# Altium PCB Advanced Clock.PcbDoc (part 3 of 7)
Units mil, origin at the board's own origin, x right, y up, seen from the top; angles counter-clockwise.
Board outline 3854 x 3880 mil, 2 copper layers (Top Layer, Bottom Layer); 117 components, 90 nets, 504 pads, 209 vias.
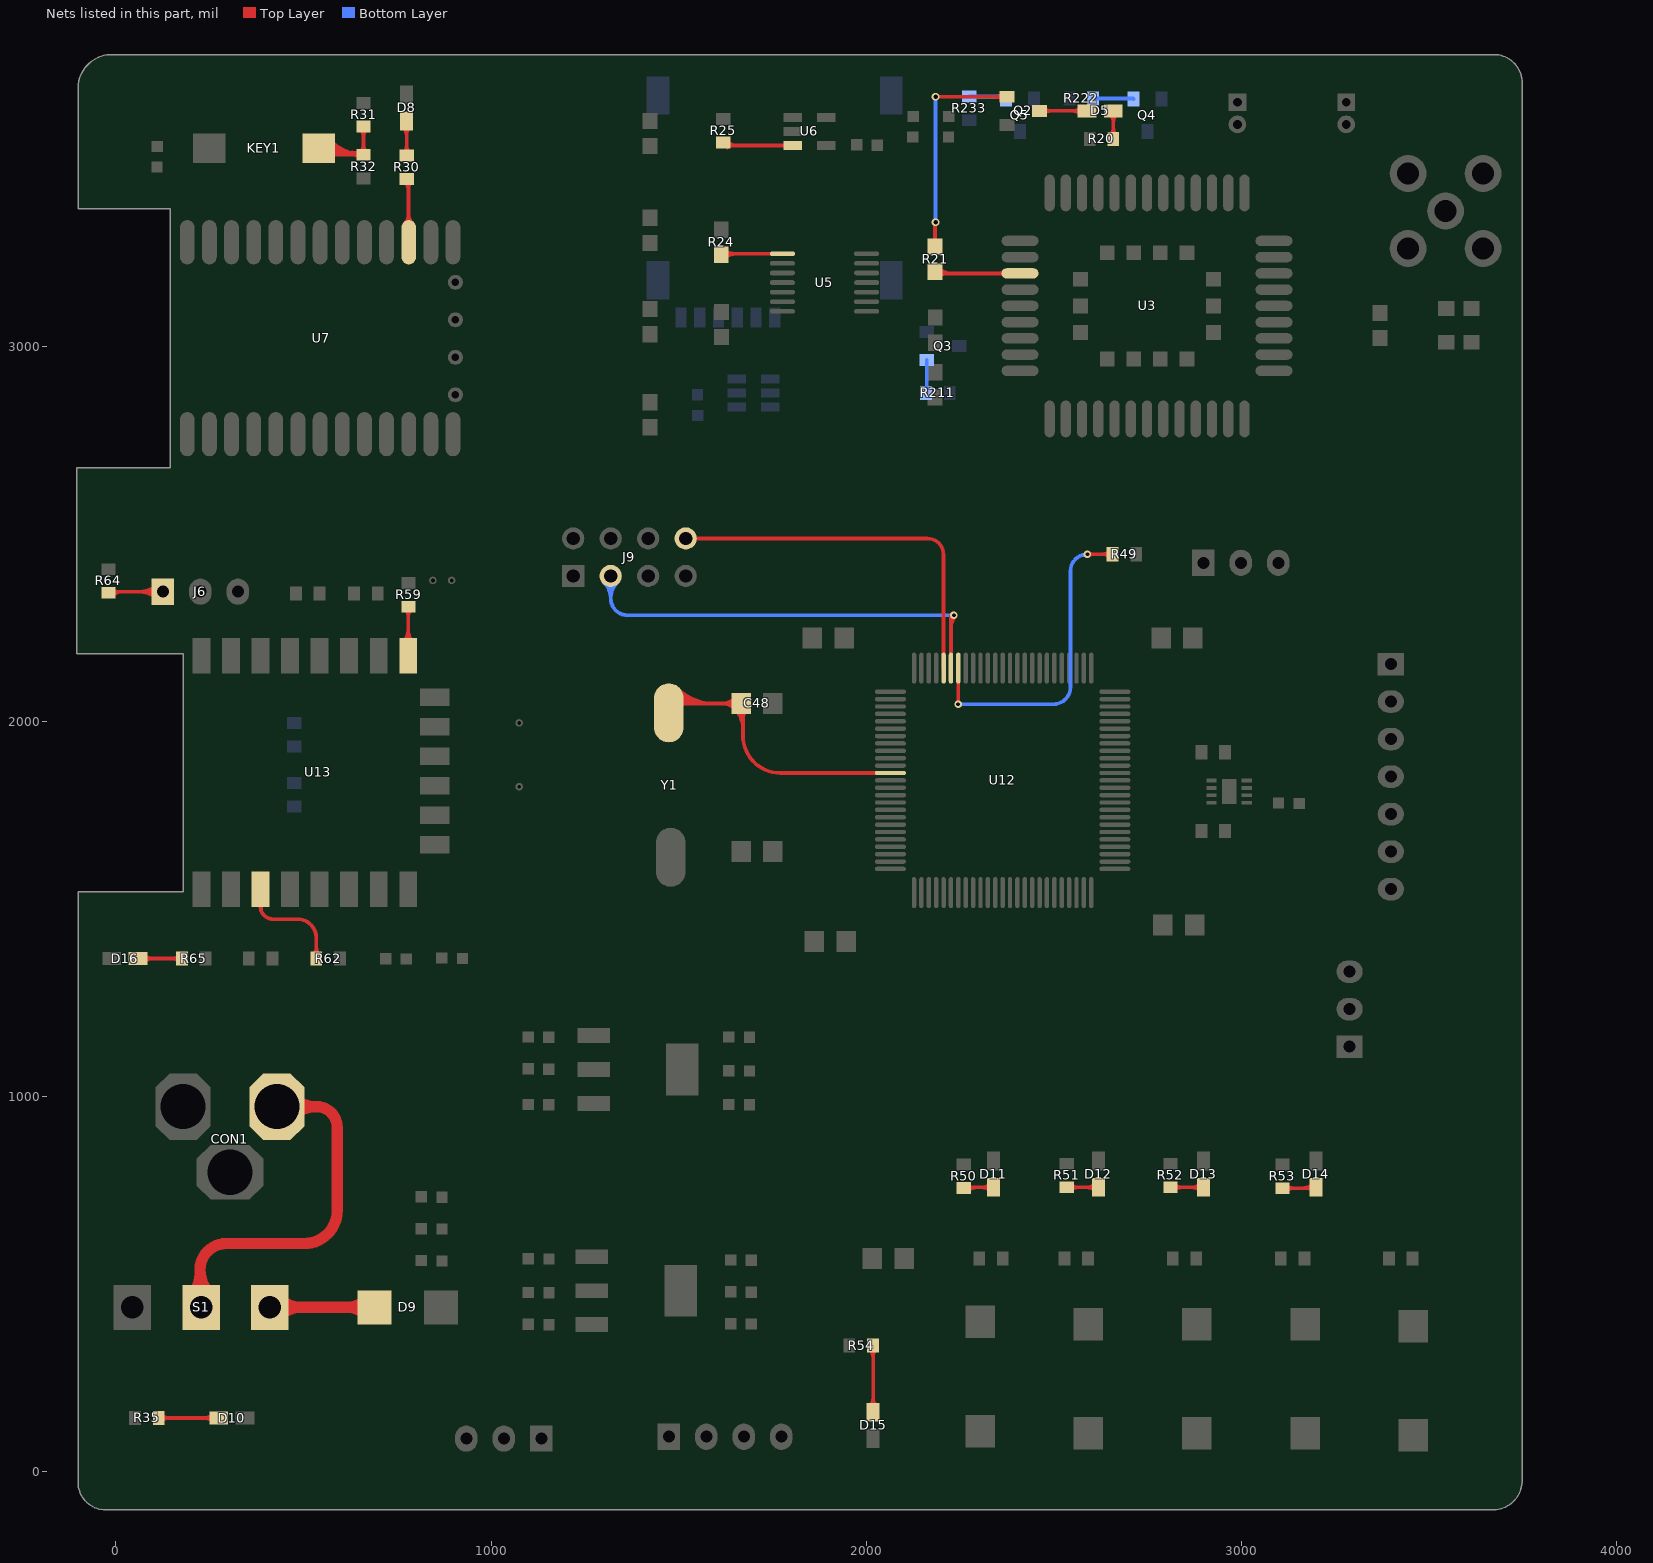
[diagram p3: the nets of this part, all layers, seen from the top]

## Via types
v1: diameter 20, hole 12, Top Layer to Bottom Layer, 133 vias
v2: diameter 20, hole 10, Top Layer to Bottom Layer, 30 vias
v3: diameter 15, hole 7, Top Layer to Bottom Layer, 26 vias
v4: diameter 30, hole 20, Top Layer to Bottom Layer, 11 vias
v5: diameter 138, hole 137.8, Top Layer to Bottom Layer, 4 vias
v6: diameter 50, hole 30, Top Layer to Bottom Layer, 4 vias
v7: diameter 40, hole 20, Top Layer to Bottom Layer, 1 vias

## Nets (pads, with @x,y where several pads share a name; then routed paths per layer and width w, separated by ;. In a path a pad name is that pad's centre, name@x,y a point inside that pad or via, vN(x,y) a via of type N, cw(c..) or ccw(c..) an arc to the next point about the centre after c; other vN are vias at no path point) (continued)
NetC48_2: C48.2 U12.12 Y1.1 | length 3559
  Top Layer w10: Y1.1@1474,2022 cw(c1479,2022) 1479,2027 1499,2047 1671.5,2047 1671.5,1961.68 ccw(c1771.5,1961.68) 1771.5,1861.68 U12.12@2064.79,1861.68 ; Y1.1@1477.09,2064.46 ccw(c1519.24,2106.61) 1519.24,2047 ; Y1.1@1477.09,2064.46 ccw(c1519.24,2106.61) 1519.24,2047 ; Y1.1@1477.09,2064.46 ccw(c1519.24,2106.61) 1519.24,2047 ; Y1.1@1477.09,2064.46 ccw(c1519.24,2106.61) 1519.24,2047 ; Y1.1@1477.09,2064.46 ccw(c1519.24,2106.61) 1519.24,2047 ; Y1.1@1484.16,2071.53 ccw(c1543.38,2130.75) 1543.38,2047 ; Y1.1@1484.16,2071.53 ccw(c1543.38,2130.75) 1543.38,2047 ; Y1.1@1484.16,2071.53 ccw(c1543.38,2130.75) 1543.38,2047 ; Y1.1@1484.16,2071.53 ccw(c1543.38,2130.75) 1543.38,2047 ; Y1.1@1484.16,2071.53 ccw(c1543.38,2130.75) 1543.38,2047 ; Y1.1@1491.23,2078.6 ccw(c1567.53,2154.9) 1567.53,2047 ; Y1.1@1491.23,2078.6 ccw(c1567.53,2154.9) 1567.53,2047 ; Y1.1@1491.23,2078.6 ccw(c1567.53,2154.9) 1567.53,2047 ; Y1.1@1491.23,2078.6 ccw(c1567.53,2154.9) 1567.53,2047 ; Y1.1@1491.23,2078.6 ccw(c1567.53,2154.9) 1567.53,2047 ; Y1.1@1498.3,2037.07 cw(c1522.28,2013.09) 1522.28,2047 ; Y1.1@1498.3,2037.07 cw(c1522.28,2013.09) 1522.28,2047 ; Y1.1@1498.3,2037.07 cw(c1522.28,2013.09) 1522.28,2047 ; Y1.1@1498.3,2037.07 cw(c1522.28,2013.09) 1522.28,2047 ; Y1.1@1498.3,2037.07 cw(c1522.28,2013.09) 1522.28,2047 ; Y1.1@1498.3,2085.67 ccw(c1591.67,2179.04) 1591.67,2047 ; Y1.1@1498.3,2085.67 ccw(c1591.67,2179.04) 1591.67,2047 ; Y1.1@1498.3,2085.67 ccw(c1591.67,2179.04) 1591.67,2047 ; Y1.1@1498.3,2085.67 ccw(c1591.67,2179.04) 1591.67,2047 ; Y1.1@1498.3,2085.67 ccw(c1591.67,2179.04) 1591.67,2047 ; 1615.8,2047 cw(c1615.8,1996.3) C48.2@1651.65,2032.15 ; 1615.8,2047 ccw(c1615.8,2097.7) C48.2@1651.65,2061.85 ; 1615.8,2047 cw(c1615.8,1996.3) C48.2@1651.65,2032.15 ; 1615.8,2047 ccw(c1615.8,2097.7) C48.2@1651.65,2061.85 ; 1615.8,2047 cw(c1615.8,1996.3) C48.2@1651.65,2032.15 ; 1615.8,2047 ccw(c1615.8,2097.7) C48.2@1651.65,2061.85 ; 1615.8,2047 cw(c1615.8,1996.3) C48.2@1651.65,2032.15 ; 1615.8,2047 ccw(c1615.8,2097.7) C48.2@1651.65,2061.85 ; 1615.8,2047 cw(c1615.8,1996.3) C48.2@1651.65,2032.15 ; 1615.8,2047 ccw(c1615.8,2097.7) C48.2@1651.65,2061.85 ; 1639.94,2047 cw(c1639.94,2020.44) C48.2@1658.72,2039.22 ; 1639.94,2047 ccw(c1639.94,2073.56) C48.2@1658.72,2054.78 ; 1639.94,2047 cw(c1639.94,2020.44) C48.2@1658.72,2039.22 ; 1639.94,2047 ccw(c1639.94,2073.56) C48.2@1658.72,2054.78 ; 1639.94,2047 cw(c1639.94,2020.44) C48.2@1658.72,2039.22 ; 1639.94,2047 ccw(c1639.94,2073.56) C48.2@1658.72,2054.78 ; 1639.94,2047 cw(c1639.94,2020.44) C48.2@1658.72,2039.22 ; 1639.94,2047 ccw(c1639.94,2073.56) C48.2@1658.72,2054.78 ; 1639.94,2047 cw(c1639.94,2020.44) C48.2@1658.72,2039.22 ; 1639.94,2047 ccw(c1639.94,2073.56) C48.2@1658.72,2054.78 ; C48.2@1651.65,2030.15 cw(c1603.73,1982.23) 1671.5,1982.23 ; C48.2@1651.65,2030.15 cw(c1603.73,1982.23) 1671.5,1982.23 ; C48.2@1651.65,2030.15 cw(c1603.73,1982.23) 1671.5,1982.23 ; C48.2@1651.65,2030.15 cw(c1603.73,1982.23) 1671.5,1982.23 ; C48.2@1651.65,2030.15 cw(c1603.73,1982.23) 1671.5,1982.23 ; C48.2@1658.72,2037.22 cw(c1627.87,2006.37) 1671.5,2006.37 ; C48.2@1658.72,2037.22 cw(c1627.87,2006.37) 1671.5,2006.37 ; C48.2@1658.72,2037.22 cw(c1627.87,2006.37) 1671.5,2006.37 ; C48.2@1658.72,2037.22 cw(c1627.87,2006.37) 1671.5,2006.37 ; C48.2@1658.72,2037.22 cw(c1627.87,2006.37) 1671.5,2006.37 ; 1671.5,2006.37 cw(c1705.13,2006.37) C48.2@1681.35,2030.15 ; 1671.5,2006.37 cw(c1705.13,2006.37) C48.2@1681.35,2030.15 ; 1671.5,2006.37 cw(c1705.13,2006.37) C48.2@1681.35,2030.15 ; 1671.5,2006.37 cw(c1705.13,2006.37) C48.2@1681.35,2030.15 ; 1671.5,2006.37 cw(c1705.13,2006.37) C48.2@1681.35,2030.15
NetCON1_1: CON1.1 S1.2 | length 2416.7
  Top Layer w30: S1.2@224,437 224,537 ; CON1.1@429,972 535.11,972 ; S1.2@202.25,471.75 ccw(c149.75,524.25) 224,524.25 ; S1.2@202.25,471.75 ccw(c149.75,524.25) 224,524.25 ; S1.2@202.25,471.75 ccw(c149.75,524.25) 224,524.25 ; S1.2@202.25,471.75 ccw(c149.75,524.25) 224,524.25 ; S1.2@202.25,471.75 ccw(c149.75,524.25) 224,524.25 ; 224,537 ccw(c314.57,537) S1.2@251.41,472.08 ; 224,537 ccw(c314.57,537) S1.2@251.41,472.08 ; 224,537 ccw(c314.57,537) S1.2@251.41,472.08 ; 224,537 ccw(c314.57,537) S1.2@251.41,472.08 ; 224,537 ccw(c314.57,537) S1.2@251.41,472.08 ; 224,537 cw(c294,537) 294,607 502,607 ccw(c502,695) 590,695 590,917.11 ccw(c535.11,917.11) 535.11,972 ; CON1.1@465.04,940.31 cw(c535.11,878.7) 535.11,972 ; CON1.1@465.04,940.31 cw(c535.11,878.7) 535.11,972 ; CON1.1@465.04,940.31 cw(c535.11,878.7) 535.11,972 ; CON1.1@465.04,940.31 cw(c535.11,878.7) 535.11,972 ; CON1.1@465.04,940.31 cw(c535.11,878.7) 535.11,972 ; CON1.1@465.04,1003.69 ccw(c535.11,1065.3) 535.11,972 ; CON1.1@465.04,1003.69 ccw(c535.11,1065.3) 535.11,972 ; CON1.1@465.04,1003.69 ccw(c535.11,1065.3) 535.11,972 ; CON1.1@465.04,1003.69 ccw(c535.11,1065.3) 535.11,972 ; CON1.1@465.04,1003.69 ccw(c535.11,1065.3) 535.11,972
NetD5_A: D5.A R20.1 | length 790
  Top Layer w10: R20.1@2659,3542 D5.A@2659,3626.74 ; D5.A@2650.16,3617.91 cw(c2628.82,3596.57) 2659,3596.57 ; D5.A@2650.16,3617.91 cw(c2628.82,3596.57) 2659,3596.57 ; D5.A@2650.16,3617.91 cw(c2628.82,3596.57) 2659,3596.57 ; D5.A@2650.16,3617.91 cw(c2628.82,3596.57) 2659,3596.57 ; D5.A@2650.16,3617.91 cw(c2628.82,3596.57) 2659,3596.57 ; D5.A@2650.16,3617.91 cw(c2628.82,3596.57) 2659,3596.57 ; D5.A@2650.16,3617.91 cw(c2628.82,3596.57) 2659,3596.57 ; D5.A@2650.16,3617.91 cw(c2628.82,3596.57) 2659,3596.57 ; R20.1@2651.4,3562.85 ccw(c2633.06,3581.18) 2659,3581.18 ; R20.1@2651.4,3562.85 ccw(c2633.06,3581.18) 2659,3581.18 ; R20.1@2651.4,3562.85 ccw(c2633.06,3581.18) 2659,3581.18 ; R20.1@2651.4,3562.85 ccw(c2633.06,3581.18) 2659,3581.18 ; R20.1@2651.4,3562.85 ccw(c2633.06,3581.18) 2659,3581.18 ; R20.1@2651.4,3562.85 ccw(c2633.06,3581.18) 2659,3581.18 ; R20.1@2651.4,3562.85 ccw(c2633.06,3581.18) 2659,3581.18 ; R20.1@2651.4,3562.85 ccw(c2633.06,3581.18) 2659,3581.18 ; 2659,3581.21 ccw(c2684.96,3581.21) R20.1@2666.6,3562.85 ; 2659,3581.21 ccw(c2684.96,3581.21) R20.1@2666.6,3562.85 ; 2659,3581.21 ccw(c2684.96,3581.21) R20.1@2666.6,3562.85 ; 2659,3581.21 ccw(c2684.96,3581.21) R20.1@2666.6,3562.85 ; 2659,3581.21 ccw(c2684.96,3581.21) R20.1@2666.6,3562.85 ; 2659,3581.21 ccw(c2684.96,3581.21) R20.1@2666.6,3562.85 ; 2659,3581.21 ccw(c2684.96,3581.21) R20.1@2666.6,3562.85 ; 2659,3581.21 ccw(c2684.96,3581.21) R20.1@2666.6,3562.85 ; 2659,3596.57 cw(c2689.17,3596.57) D5.A@2667.83,3617.91 ; 2659,3596.57 cw(c2689.17,3596.57) D5.A@2667.83,3617.91 ; 2659,3596.57 cw(c2689.17,3596.57) D5.A@2667.83,3617.91 ; 2659,3596.57 cw(c2689.17,3596.57) D5.A@2667.83,3617.91 ; 2659,3596.57 cw(c2689.17,3596.57) D5.A@2667.83,3617.91 ; 2659,3596.57 cw(c2689.17,3596.57) D5.A@2667.83,3617.91 ; 2659,3596.57 cw(c2689.17,3596.57) D5.A@2667.83,3617.91 ; 2659,3596.57 cw(c2689.17,3596.57) D5.A@2667.83,3617.91
NetD5_K: D5.K Q2.3 | length 690
  Top Layer w10: Q2.3@2462.31,3627 2589,3627 D5.K@2589,3626.74 ; Q2.3@2473.84,3619.4 cw(c2492.19,3601.05) 2492.19,3627 ; Q2.3@2473.84,3619.4 cw(c2492.19,3601.05) 2492.19,3627 ; Q2.3@2473.84,3619.4 cw(c2492.19,3601.05) 2492.19,3627 ; Q2.3@2473.84,3619.4 cw(c2492.19,3601.05) 2492.19,3627 ; Q2.3@2473.84,3619.4 cw(c2492.19,3601.05) 2492.19,3627 ; Q2.3@2473.84,3619.4 cw(c2492.19,3601.05) 2492.19,3627 ; Q2.3@2473.84,3619.4 cw(c2492.19,3601.05) 2492.19,3627 ; Q2.3@2473.84,3619.4 cw(c2492.19,3601.05) 2492.19,3627 ; Q2.3@2473.84,3634.6 ccw(c2492.19,3652.95) 2492.19,3627 ; Q2.3@2473.84,3634.6 ccw(c2492.19,3652.95) 2492.19,3627 ; Q2.3@2473.84,3634.6 ccw(c2492.19,3652.95) 2492.19,3627 ; Q2.3@2473.84,3634.6 ccw(c2492.19,3652.95) 2492.19,3627 ; Q2.3@2473.84,3634.6 ccw(c2492.19,3652.95) 2492.19,3627 ; Q2.3@2473.84,3634.6 ccw(c2492.19,3652.95) 2492.19,3627 ; Q2.3@2473.84,3634.6 ccw(c2492.19,3652.95) 2492.19,3627 ; Q2.3@2473.84,3634.6 ccw(c2492.19,3652.95) 2492.19,3627 ; 2550.7,3627 cw(c2550.7,3595.95) D5.K@2572.66,3617.91 ; 2550.7,3627 cw(c2550.7,3595.95) D5.K@2572.66,3617.91 ; 2550.7,3627 cw(c2550.7,3595.95) D5.K@2572.66,3617.91 ; 2550.7,3627 cw(c2550.7,3595.95) D5.K@2572.66,3617.91 ; 2550.7,3627 cw(c2550.7,3595.95) D5.K@2572.66,3617.91 ; 2551.93,3627 ccw(c2551.93,3656.3) D5.K@2572.66,3635.58 ; 2551.93,3627 ccw(c2551.93,3656.3) D5.K@2572.66,3635.58 ; 2551.93,3627 ccw(c2551.93,3656.3) D5.K@2572.66,3635.58 ; 2551.93,3627 ccw(c2551.93,3656.3) D5.K@2572.66,3635.58 ; 2551.93,3627 ccw(c2551.93,3656.3) D5.K@2572.66,3635.58
NetD8_A: D8.A R30.2 | length 655.1
  Top Layer w10: R30.2@775,3507.99 D8.A@775,3600 ; D8.A@765.91,3583.67 cw(c743.95,3561.71) 775,3561.71 ; D8.A@765.91,3583.67 cw(c743.95,3561.71) 775,3561.71 ; D8.A@765.91,3583.67 cw(c743.95,3561.71) 775,3561.71 ; D8.A@765.91,3583.67 cw(c743.95,3561.71) 775,3561.71 ; D8.A@765.91,3583.67 cw(c743.95,3561.71) 775,3561.71 ; R30.2@767.4,3515.59 ccw(c749.05,3533.94) 775,3533.94 ; R30.2@767.4,3515.59 ccw(c749.05,3533.94) 775,3533.94 ; R30.2@767.4,3515.59 ccw(c749.05,3533.94) 775,3533.94 ; R30.2@767.4,3515.59 ccw(c749.05,3533.94) 775,3533.94 ; R30.2@767.4,3515.59 ccw(c749.05,3533.94) 775,3533.94 ; R30.2@767.4,3515.59 ccw(c749.05,3533.94) 775,3533.94 ; R30.2@767.4,3515.59 ccw(c749.05,3533.94) 775,3533.94 ; R30.2@767.4,3515.59 ccw(c749.05,3533.94) 775,3533.94 ; 775,3533.94 ccw(c800.95,3533.94) R30.2@782.6,3515.59 ; 775,3533.94 ccw(c800.95,3533.94) R30.2@782.6,3515.59 ; 775,3533.94 ccw(c800.95,3533.94) R30.2@782.6,3515.59 ; 775,3533.94 ccw(c800.95,3533.94) R30.2@782.6,3515.59 ; 775,3533.94 ccw(c800.95,3533.94) R30.2@782.6,3515.59 ; 775,3533.94 ccw(c800.95,3533.94) R30.2@782.6,3515.59 ; 775,3533.94 ccw(c800.95,3533.94) R30.2@782.6,3515.59 ; 775,3533.94 ccw(c800.95,3533.94) R30.2@782.6,3515.59 ; 775,3562.95 cw(c804.3,3562.95) D8.A@783.58,3583.67 ; 775,3562.95 cw(c804.3,3562.95) D8.A@783.58,3583.67 ; 775,3562.95 cw(c804.3,3562.95) D8.A@783.58,3583.67 ; 775,3562.95 cw(c804.3,3562.95) D8.A@783.58,3583.67 ; 775,3562.95 cw(c804.3,3562.95) D8.A@783.58,3583.67
NetD9_1: D9.1 S1.3 | length 1530.8
  Top Layer w10: D9.1@689,437 D9.1@699,427
  Top Layer w30: S1.3@410,437 D9.1@689,437 ; S1.3@434.75,412.25 cw(c494.5,352.5) 494.5,437 ; S1.3@434.75,412.25 cw(c494.5,352.5) 494.5,437 ; S1.3@434.75,412.25 cw(c494.5,352.5) 494.5,437 ; S1.3@434.75,412.25 cw(c494.5,352.5) 494.5,437 ; S1.3@434.75,412.25 cw(c494.5,352.5) 494.5,437 ; S1.3@434.75,461.75 ccw(c494.5,521.5) 494.5,437 ; S1.3@434.75,461.75 ccw(c494.5,521.5) 494.5,437 ; S1.3@434.75,461.75 ccw(c494.5,521.5) 494.5,437 ; S1.3@434.75,461.75 ccw(c494.5,521.5) 494.5,437 ; S1.3@434.75,461.75 ccw(c494.5,521.5) 494.5,437 ; 615.91,437 cw(c615.91,363.91) D9.1@667.59,415.59 ; 615.91,437 ccw(c615.91,510.09) D9.1@667.59,458.41 ; 615.91,437 cw(c615.91,363.91) D9.1@667.59,415.59 ; 615.91,437 ccw(c615.91,510.09) D9.1@667.59,458.41 ; 615.91,437 cw(c615.91,363.91) D9.1@667.59,415.59 ; 615.91,437 ccw(c615.91,510.09) D9.1@667.59,458.41 ; 615.91,437 cw(c615.91,363.91) D9.1@667.59,415.59 ; 615.91,437 ccw(c615.91,510.09) D9.1@667.59,458.41 ; 615.91,437 cw(c615.91,363.91) D9.1@667.59,415.59 ; 615.91,437 ccw(c615.91,510.09) D9.1@667.59,458.41
NetD10_K: D10.K R35.1 | length 865.5
  Top Layer w10: R35.1@114,142 114,141.74 D10.K@274,141.74 ; R35.1@121.6,134.4 cw(c139.33,116.67) 139.33,141.74 ; R35.1@121.6,134.4 cw(c139.33,116.67) 139.33,141.74 ; R35.1@121.6,134.4 cw(c139.33,116.67) 139.33,141.74 ; R35.1@121.6,134.4 cw(c139.33,116.67) 139.33,141.74 ; R35.1@121.6,134.4 cw(c139.33,116.67) 139.33,141.74 ; R35.1@121.6,134.4 cw(c139.33,116.67) 139.33,141.74 ; R35.1@121.6,134.4 cw(c139.33,116.67) 139.33,141.74 ; R35.1@121.6,134.4 cw(c139.33,116.67) 139.33,141.74 ; R35.1@121.6,149.6 ccw(c140.57,168.57) 140.57,141.74 ; R35.1@121.6,149.6 ccw(c140.57,168.57) 140.57,141.74 ; R35.1@121.6,149.6 ccw(c140.57,168.57) 140.57,141.74 ; R35.1@121.6,149.6 ccw(c140.57,168.57) 140.57,141.74 ; R35.1@121.6,149.6 ccw(c140.57,168.57) 140.57,141.74 ; R35.1@121.6,149.6 ccw(c140.57,168.57) 140.57,141.74 ; R35.1@121.6,149.6 ccw(c140.57,168.57) 140.57,141.74 ; R35.1@121.6,149.6 ccw(c140.57,168.57) 140.57,141.74 ; 236.32,141.74 cw(c236.32,111.57) D10.K@257.66,132.91 ; 236.32,141.74 ccw(c236.32,171.92) D10.K@257.66,150.58 ; 236.32,141.74 cw(c236.32,111.57) D10.K@257.66,132.91 ; 236.32,141.74 ccw(c236.32,171.92) D10.K@257.66,150.58 ; 236.32,141.74 cw(c236.32,111.57) D10.K@257.66,132.91 ; 236.32,141.74 ccw(c236.32,171.92) D10.K@257.66,150.58 ; 236.32,141.74 cw(c236.32,111.57) D10.K@257.66,132.91 ; 236.32,141.74 ccw(c236.32,171.92) D10.K@257.66,150.58 ; 236.32,141.74 cw(c236.32,111.57) D10.K@257.66,132.91 ; 236.32,141.74 ccw(c236.32,171.92) D10.K@257.66,150.58 ; 236.32,141.74 cw(c236.32,111.57) D10.K@257.66,132.91 ; 236.32,141.74 ccw(c236.32,171.92) D10.K@257.66,150.58 ; 236.32,141.74 cw(c236.32,111.57) D10.K@257.66,132.91 ; 236.32,141.74 ccw(c236.32,171.92) D10.K@257.66,150.58 ; 236.32,141.74 cw(c236.32,111.57) D10.K@257.66,132.91 ; 236.32,141.74 ccw(c236.32,171.92) D10.K@257.66,150.58
NetD11_K: D11.K R50.1 | length 553.5
  Top Layer w10: R50.1@2246.5,757 D11.K@2339.26,757 ; 2309.08,757 cw(c2309.08,726.82) D11.K@2330.42,748.16 ; 2309.08,757 ccw(c2309.08,787.17) D11.K@2330.42,765.83 ; 2309.08,757 cw(c2309.08,726.82) D11.K@2330.42,748.16 ; 2309.08,757 ccw(c2309.08,787.17) D11.K@2330.42,765.83 ; 2309.08,757 cw(c2309.08,726.82) D11.K@2330.42,748.16 ; 2309.08,757 ccw(c2309.08,787.17) D11.K@2330.42,765.83 ; 2309.08,757 cw(c2309.08,726.82) D11.K@2330.42,748.16 ; 2309.08,757 ccw(c2309.08,787.17) D11.K@2330.42,765.83 ; 2309.08,757 cw(c2309.08,726.82) D11.K@2330.42,748.16 ; 2309.08,757 ccw(c2309.08,787.17) D11.K@2330.42,765.83 ; 2309.08,757 cw(c2309.08,726.82) D11.K@2330.42,748.16 ; 2309.08,757 ccw(c2309.08,787.17) D11.K@2330.42,765.83 ; 2309.08,757 cw(c2309.08,726.82) D11.K@2330.42,748.16 ; 2309.08,757 ccw(c2309.08,787.17) D11.K@2330.42,765.83 ; 2309.08,757 cw(c2309.08,726.82) D11.K@2330.42,748.16 ; 2309.08,757 ccw(c2309.08,787.17) D11.K@2330.42,765.83 ; R50.1@2270.85,747.4 cw(c2294.01,724.24) 2294.01,757 ccw(c2294.01,724.24) R50.1@2270.85,747.4 ; R50.1@2270.85,762.6 ccw(c2284.38,776.13) 2284.38,757 cw(c2284.38,776.13) R50.1@2270.85,762.6
NetD12_K: D12.K R51.1 | length 599.3
  Top Layer w10: R51.1@2521.5,757 D12.K@2619.26,757 ; R51.1@2545.85,749.4 cw(c2564.2,731.05) 2564.2,757 ; R51.1@2545.85,749.4 cw(c2564.2,731.05) 2564.2,757 ; R51.1@2545.85,749.4 cw(c2564.2,731.05) 2564.2,757 ; R51.1@2545.85,764.6 ccw(c2564.2,782.94) 2564.2,757 ; R51.1@2545.85,764.6 ccw(c2564.2,782.94) 2564.2,757 ; R51.1@2545.85,764.6 ccw(c2564.2,782.94) 2564.2,757 ; 2589.08,757 cw(c2589.08,726.82) D12.K@2610.42,748.16 ; 2589.08,757 ccw(c2589.08,787.17) D12.K@2610.42,765.83 ; 2589.08,757 cw(c2589.08,726.82) D12.K@2610.42,748.16 ; 2589.08,757 ccw(c2589.08,787.17) D12.K@2610.42,765.83 ; 2589.08,757 cw(c2589.08,726.82) D12.K@2610.42,748.16 ; 2589.08,757 ccw(c2589.08,787.17) D12.K@2610.42,765.83 ; 2589.08,757 cw(c2589.08,726.82) D12.K@2610.42,748.16 ; 2589.08,757 ccw(c2589.08,787.17) D12.K@2610.42,765.83 ; 2589.08,757 cw(c2589.08,726.82) D12.K@2610.42,748.16 ; 2589.08,757 ccw(c2589.08,787.17) D12.K@2610.42,765.83 ; 2589.08,757 cw(c2589.08,726.82) D12.K@2610.42,748.16 ; 2589.08,757 ccw(c2589.08,787.17) D12.K@2610.42,765.83 ; 2589.08,757 cw(c2589.08,726.82) D12.K@2610.42,748.16 ; 2589.08,757 ccw(c2589.08,787.17) D12.K@2610.42,765.83 ; 2589.08,757 cw(c2589.08,726.82) D12.K@2610.42,748.16 ; 2589.08,757 ccw(c2589.08,787.17) D12.K@2610.42,765.83
NetD13_K: D13.K R52.1 | length 589.3
  Top Layer w10: R52.1@2811.5,757 D13.K@2899.26,757 ; R52.1@2822.34,749.4 cw(c2840.69,731.05) 2840.69,757 ; R52.1@2822.34,749.4 cw(c2840.69,731.05) 2840.69,757 ; R52.1@2822.34,749.4 cw(c2840.69,731.05) 2840.69,757 ; R52.1@2822.34,764.6 ccw(c2840.69,782.94) 2840.69,757 ; R52.1@2822.34,764.6 ccw(c2840.69,782.94) 2840.69,757 ; R52.1@2822.34,764.6 ccw(c2840.69,782.94) 2840.69,757 ; 2869.08,757 cw(c2869.08,726.82) D13.K@2890.42,748.16 ; 2869.08,757 ccw(c2869.08,787.17) D13.K@2890.42,765.83 ; 2869.08,757 cw(c2869.08,726.82) D13.K@2890.42,748.16 ; 2869.08,757 ccw(c2869.08,787.17) D13.K@2890.42,765.83 ; 2869.08,757 cw(c2869.08,726.82) D13.K@2890.42,748.16 ; 2869.08,757 ccw(c2869.08,787.17) D13.K@2890.42,765.83 ; 2869.08,757 cw(c2869.08,726.82) D13.K@2890.42,748.16 ; 2869.08,757 ccw(c2869.08,787.17) D13.K@2890.42,765.83 ; 2869.08,757 cw(c2869.08,726.82) D13.K@2890.42,748.16 ; 2869.08,757 ccw(c2869.08,787.17) D13.K@2890.42,765.83 ; 2869.08,757 cw(c2869.08,726.82) D13.K@2890.42,748.16 ; 2869.08,757 ccw(c2869.08,787.17) D13.K@2890.42,765.83 ; 2869.08,757 cw(c2869.08,726.82) D13.K@2890.42,748.16 ; 2869.08,757 ccw(c2869.08,787.17) D13.K@2890.42,765.83 ; 2869.08,757 cw(c2869.08,726.82) D13.K@2890.42,748.16 ; 2869.08,757 ccw(c2869.08,787.17) D13.K@2890.42,765.83
NetD14_K: D14.K R53.1 | length 456
  Top Layer w10: R53.1@3104,754.5 3196.76,754.5 ccw(c3196.76,757) D14.K@3199.26,757 ; R53.1@3120.85,746.9 cw(c3139.2,728.55) 3139.2,754.5 ; R53.1@3120.85,746.9 cw(c3139.2,728.55) 3139.2,754.5 ; R53.1@3120.85,746.9 cw(c3139.2,728.55) 3139.2,754.5 ; R53.1@3120.85,762.1 ccw(c3139.2,780.45) 3139.2,754.5 ; R53.1@3120.85,762.1 ccw(c3139.2,780.45) 3139.2,754.5 ; R53.1@3120.85,762.1 ccw(c3139.2,780.45) 3139.2,754.5 ; 3163.05,754.5 ccw(c3163.05,793.2) D14.K@3190.42,765.83 ; 3163.05,754.5 ccw(c3163.05,793.2) D14.K@3190.42,765.83 ; 3163.05,754.5 ccw(c3163.05,793.2) D14.K@3190.42,765.83 ; 3163.05,754.5 ccw(c3163.05,793.2) D14.K@3190.42,765.83 ; 3163.05,754.5 ccw(c3163.05,793.2) D14.K@3190.42,765.83 ; 3175.1,754.5 cw(c3175.1,732.84) D14.K@3190.42,748.16 ; 3175.1,754.5 cw(c3175.1,732.84) D14.K@3190.42,748.16 ; 3175.1,754.5 cw(c3175.1,732.84) D14.K@3190.42,748.16 ; 3175.1,754.5 cw(c3175.1,732.84) D14.K@3190.42,748.16 ; 3175.1,754.5 cw(c3175.1,732.84) D14.K@3190.42,748.16
NetD15_K: D15.K R54.2 | length 800.6
  Top Layer w10: D15.K@2018.74,157 2018.74,344.5 R54.2@2019,344.5 ; D15.K@2009.91,173.34 ccw(c1988.57,194.68) 2018.74,194.68 ; D15.K@2009.91,173.34 ccw(c1988.57,194.68) 2018.74,194.68 ; D15.K@2009.91,173.34 ccw(c1988.57,194.68) 2018.74,194.68 ; D15.K@2009.91,173.34 ccw(c1988.57,194.68) 2018.74,194.68 ; D15.K@2009.91,173.34 ccw(c1988.57,194.68) 2018.74,194.68 ; D15.K@2009.91,173.34 ccw(c1988.57,194.68) 2018.74,194.68 ; D15.K@2009.91,173.34 ccw(c1988.57,194.68) 2018.74,194.68 ; D15.K@2009.91,173.34 ccw(c1988.57,194.68) 2018.74,194.68 ; R54.2@2010.39,324.15 cw(c1990.23,303.99) 2018.74,303.99 ; R54.2@2010.39,324.15 cw(c1990.23,303.99) 2018.74,303.99 ; R54.2@2010.39,324.15 cw(c1990.23,303.99) 2018.74,303.99 ; 2018.74,194.68 ccw(c2048.92,194.68) D15.K@2027.58,173.34 ; 2018.74,194.68 ccw(c2048.92,194.68) D15.K@2027.58,173.34 ; 2018.74,194.68 ccw(c2048.92,194.68) D15.K@2027.58,173.34 ; 2018.74,194.68 ccw(c2048.92,194.68) D15.K@2027.58,173.34 ; 2018.74,194.68 ccw(c2048.92,194.68) D15.K@2027.58,173.34 ; 2018.74,194.68 ccw(c2048.92,194.68) D15.K@2027.58,173.34 ; 2018.74,194.68 ccw(c2048.92,194.68) D15.K@2027.58,173.34 ; 2018.74,194.68 ccw(c2048.92,194.68) D15.K@2027.58,173.34 ; 2018.74,307.62 cw(c2042.12,307.62) R54.2@2025.59,324.15 ; 2018.74,307.62 cw(c2042.12,307.62) R54.2@2025.59,324.15 ; 2018.74,307.62 cw(c2042.12,307.62) R54.2@2025.59,324.15 ; R54.2@2008.62,334.12 cw(c1984.17,309.67) 2018.74,309.67 ccw(c1984.17,309.67) R54.2@2008.62,334.12 ; 2018.74,308.43 cw(c2055.07,308.43) 2029.38,334.12 ccw(c2055.07,308.43) 2018.74,308.43
NetD16_A: D16.A R65.2 | length 680.1
  Top Layer w10: D16.A@59,1367 R65.2@176.01,1367 ; D16.A@75.33,1357.91 cw(c97.29,1335.95) 97.29,1367 ; D16.A@75.33,1357.91 cw(c97.29,1335.95) 97.29,1367 ; D16.A@75.33,1357.91 cw(c97.29,1335.95) 97.29,1367 ; D16.A@75.33,1357.91 cw(c97.29,1335.95) 97.29,1367 ; D16.A@75.33,1357.91 cw(c97.29,1335.95) 97.29,1367 ; D16.A@75.33,1375.58 ccw(c96.05,1396.3) 96.05,1367 ; D16.A@75.33,1375.58 ccw(c96.05,1396.3) 96.05,1367 ; D16.A@75.33,1375.58 ccw(c96.05,1396.3) 96.05,1367 ; D16.A@75.33,1375.58 ccw(c96.05,1396.3) 96.05,1367 ; D16.A@75.33,1375.58 ccw(c96.05,1396.3) 96.05,1367 ; 150.06,1367 cw(c150.06,1341.05) R65.2@168.41,1359.4 ; 150.06,1367 ccw(c150.06,1392.95) R65.2@168.41,1374.6 ; 150.06,1367 cw(c150.06,1341.05) R65.2@168.41,1359.4 ; 150.06,1367 ccw(c150.06,1392.95) R65.2@168.41,1374.6 ; 150.06,1367 cw(c150.06,1341.05) R65.2@168.41,1359.4 ; 150.06,1367 ccw(c150.06,1392.95) R65.2@168.41,1374.6 ; 150.06,1367 cw(c150.06,1341.05) R65.2@168.41,1359.4 ; 150.06,1367 ccw(c150.06,1392.95) R65.2@168.41,1374.6 ; 150.06,1367 cw(c150.06,1341.05) R65.2@168.41,1359.4 ; 150.06,1367 ccw(c150.06,1392.95) R65.2@168.41,1374.6 ; 150.06,1367 cw(c150.06,1341.05) R65.2@168.41,1359.4 ; 150.06,1367 ccw(c150.06,1392.95) R65.2@168.41,1374.6 ; 150.06,1367 cw(c150.06,1341.05) R65.2@168.41,1359.4 ; 150.06,1367 ccw(c150.06,1392.95) R65.2@168.41,1374.6 ; 150.06,1367 cw(c150.06,1341.05) R65.2@168.41,1359.4 ; 150.06,1367 ccw(c150.06,1392.95) R65.2@168.41,1374.6
NetJ6_1: J6.1 R64.2 | length 1108.9
  Top Layer w10: R64.2@-20,2342.01 cw(c-17.01,2342.01) -17.01,2345 J6.1@125,2345 ; R64.2@-9.15,2334.41 cw(c16.42,2308.84) 16.42,2345 ; R64.2@-9.15,2334.41 cw(c16.42,2308.84) 16.42,2345 ; R64.2@-9.15,2334.41 cw(c16.42,2308.84) 16.42,2345 ; R64.2@-9.15,2334.41 cw(c16.42,2308.84) 16.42,2345 ; R64.2@-9.15,2334.41 cw(c16.42,2308.84) 16.42,2345 ; R64.2@-9.15,2349.61 ccw(c1.97,2360.73) 1.97,2345 ; R64.2@-9.15,2349.61 ccw(c1.97,2360.73) 1.97,2345 ; R64.2@-9.15,2349.61 ccw(c1.97,2360.73) 1.97,2345 ; R64.2@-9.15,2349.61 ccw(c1.97,2360.73) 1.97,2345 ; R64.2@-9.15,2349.61 ccw(c1.97,2360.73) 1.97,2345 ; 64.64,2345 cw(c64.64,2284.64) J6.1@107.32,2327.32 ; 64.64,2345 ccw(c64.64,2405.36) J6.1@107.32,2362.68 ; 64.64,2345 cw(c64.64,2284.64) J6.1@107.32,2327.32 ; 64.64,2345 ccw(c64.64,2405.36) J6.1@107.32,2362.68 ; 64.64,2345 cw(c64.64,2284.64) J6.1@107.32,2327.32 ; 64.64,2345 ccw(c64.64,2405.36) J6.1@107.32,2362.68 ; 64.64,2345 cw(c64.64,2284.64) J6.1@107.32,2327.32 ; 64.64,2345 ccw(c64.64,2405.36) J6.1@107.32,2362.68 ; 64.64,2345 cw(c64.64,2284.64) J6.1@107.32,2327.32 ; 64.64,2345 ccw(c64.64,2405.36) J6.1@107.32,2362.68 ; 88.79,2345 cw(c88.79,2308.79) J6.1@114.39,2334.39 ; 88.79,2345 ccw(c88.79,2381.21) J6.1@114.39,2355.61 ; 88.79,2345 cw(c88.79,2308.79) J6.1@114.39,2334.39 ; 88.79,2345 ccw(c88.79,2381.21) J6.1@114.39,2355.61 ; 88.79,2345 cw(c88.79,2308.79) J6.1@114.39,2334.39 ; 88.79,2345 ccw(c88.79,2381.21) J6.1@114.39,2355.61 ; 88.79,2345 cw(c88.79,2308.79) J6.1@114.39,2334.39 ; 88.79,2345 ccw(c88.79,2381.21) J6.1@114.39,2355.61 ; 88.79,2345 cw(c88.79,2308.79) J6.1@114.39,2334.39 ; 88.79,2345 ccw(c88.79,2381.21) J6.1@114.39,2355.61
NetKEY1_2: KEY1.2 R31.1 R32.1 | length 3414.2
  Top Layer w10: KEY1.2@540.34,3527 ccw(c557.34,3527) 557.34,3510 R32.1@660,3510 ; R31.1@660,3585 R32.1@660,3510 ; KEY1.2@547.52,3529.93 ccw(c592.41,3570.54) 592.41,3510 ; KEY1.2@547.52,3529.93 ccw(c592.41,3570.54) 592.41,3510 ; KEY1.2@547.52,3529.93 ccw(c592.41,3570.54) 592.41,3510 ; KEY1.2@547.52,3529.93 ccw(c592.41,3570.54) 592.41,3510 ; KEY1.2@547.52,3529.93 ccw(c592.41,3570.54) 592.41,3510 ; KEY1.2@554.93,3536.64 ccw(c614.94,3590.91) 614.94,3510 ; KEY1.2@554.93,3536.64 ccw(c614.94,3590.91) 614.94,3510 ; KEY1.2@554.93,3536.64 ccw(c614.94,3590.91) 614.94,3510 ; KEY1.2@554.93,3536.64 ccw(c614.94,3590.91) 614.94,3510 ; KEY1.2@554.93,3536.64 ccw(c614.94,3590.91) 614.94,3510 ; KEY1.2@562.35,3543.35 ccw(c637.47,3611.28) 637.47,3510 ; KEY1.2@562.35,3543.35 ccw(c637.47,3611.28) 637.47,3510 ; KEY1.2@562.35,3543.35 ccw(c637.47,3611.28) 637.47,3510 ; KEY1.2@562.35,3543.35 ccw(c637.47,3611.28) 637.47,3510 ; KEY1.2@562.35,3543.35 ccw(c637.47,3611.28) 637.47,3510 ; KEY1.2@568.58,3502.7 cw(c586.21,3485.06) 586.21,3510 ; KEY1.2@568.58,3502.7 cw(c586.21,3485.06) 586.21,3510 ; KEY1.2@568.58,3502.7 cw(c586.21,3485.06) 586.21,3510 ; KEY1.2@568.58,3502.7 cw(c586.21,3485.06) 586.21,3510 ; KEY1.2@568.58,3502.7 cw(c586.21,3485.06) 586.21,3510 ; KEY1.2@569.77,3550.05 ccw(c659.99,3631.65) R32.1@660,3510 ; KEY1.2@569.77,3550.05 ccw(c659.99,3631.65) R32.1@660,3510 ; KEY1.2@569.77,3550.05 ccw(c659.99,3631.65) R32.1@660,3510 ; KEY1.2@569.77,3550.05 ccw(c659.99,3631.65) R32.1@660,3510 ; KEY1.2@569.77,3550.05 ccw(c659.99,3631.65) R32.1@660,3510 ; 629.92,3516.19 cw(c624.24,3488.59) R32.1@647.78,3504.09 ; 629.92,3516.19 cw(c624.24,3488.59) R32.1@647.78,3504.09 ; 629.92,3516.19 cw(c624.24,3488.59) R32.1@647.78,3504.09 ; 629.92,3516.19 cw(c624.24,3488.59) R32.1@647.78,3504.09 ; 629.92,3516.19 cw(c624.24,3488.59) R32.1@647.78,3504.09 ; 629.92,3516.19 cw(c624.24,3488.59) R32.1@647.78,3504.09 ; 629.92,3516.19 cw(c624.24,3488.59) R32.1@647.78,3504.09 ; 629.92,3516.19 cw(c624.24,3488.59) R32.1@647.78,3504.09 ; 629.92,3516.19 cw(c624.24,3488.59) R32.1@647.78,3504.09 ; 629.92,3516.19 cw(c624.24,3488.59) R32.1@647.78,3504.09 ; 629.92,3516.19 cw(c624.24,3488.59) R32.1@647.78,3504.09 ; 629.92,3516.19 cw(c624.24,3488.59) R32.1@647.78,3504.09 ; 629.92,3516.19 cw(c624.24,3488.59) R32.1@647.78,3504.09 ; 629.92,3516.19 cw(c624.24,3488.59) R32.1@647.78,3504.09 ; 629.92,3516.19 cw(c624.24,3488.59) R32.1@647.78,3504.09 ; 630.8,3510 cw(c630.8,3484.05) R32.1@649.15,3502.4 ; 630.8,3510 ccw(c630.8,3535.95) R32.1@649.15,3517.6 ; 630.8,3510 cw(c630.8,3484.05) R32.1@649.15,3502.4 ; 630.8,3510 ccw(c630.8,3535.95) R32.1@649.15,3517.6 ; 630.8,3510 cw(c630.8,3484.05) R32.1@649.15,3502.4 ; 630.8,3510 ccw(c630.8,3535.95) R32.1@649.15,3517.6 ; 630.8,3510 cw(c630.8,3484.05) R32.1@649.15,3502.4 ; 630.8,3510 ccw(c630.8,3535.95) R32.1@649.15,3517.6 ; 630.8,3510 cw(c630.8,3484.05) R32.1@649.15,3502.4 ; 630.8,3510 ccw(c630.8,3535.95) R32.1@649.15,3517.6 ; 630.8,3510 cw(c630.8,3484.05) R32.1@649.15,3502.4 ; 630.8,3510 ccw(c630.8,3535.95) R32.1@649.15,3517.6 ; 630.8,3510 cw(c630.8,3484.05) R32.1@649.15,3502.4 ; 630.8,3510 ccw(c630.8,3535.95) R32.1@649.15,3517.6 ; 630.8,3510 cw(c630.8,3484.05) R32.1@649.15,3502.4 ; 630.8,3510 ccw(c630.8,3535.95) R32.1@649.15,3517.6 ; 633.01,3515.55 ccw(c637.8,3538.78) R32.1@650.84,3518.98 ; 633.01,3515.55 ccw(c637.8,3538.78) R32.1@650.84,3518.98 ; 633.01,3515.55 ccw(c637.8,3538.78) R32.1@650.84,3518.98 ; 633.01,3515.55 ccw(c637.8,3538.78) R32.1@650.84,3518.98 ; 633.01,3515.55 ccw(c637.8,3538.78) R32.1@650.84,3518.98 ; 633.01,3515.55 ccw(c637.8,3538.78) R32.1@650.84,3518.98 ; 633.01,3515.55 ccw(c637.8,3538.78) R32.1@650.84,3518.98 ; 633.01,3515.55 ccw(c637.8,3538.78) R32.1@650.84,3518.98 ; 633.01,3515.55 ccw(c637.8,3538.78) R32.1@650.84,3518.98 ; 633.01,3515.55 ccw(c637.8,3538.78) R32.1@650.84,3518.98 ; 633.01,3515.55 ccw(c637.8,3538.78) R32.1@650.84,3518.98 ; 633.01,3515.55 ccw(c637.8,3538.78) R32.1@650.84,3518.98 ; 633.01,3515.55 ccw(c637.8,3538.78) R32.1@650.84,3518.98 ; 633.01,3515.55 ccw(c637.8,3538.78) R32.1@650.84,3518.98 ; 633.01,3515.55 ccw(c637.8,3538.78) R32.1@650.84,3518.98 ; R32.1@652.4,3517.6 ccw(c634.05,3535.95) 660,3535.95 ; R32.1@652.4,3517.6 ccw(c634.05,3535.95) 660,3535.95 ; R32.1@652.4,3517.6 ccw(c634.05,3535.95) 660,3535.95 ; R32.1@652.4,3517.6 ccw(c634.05,3535.95) 660,3535.95 ; R32.1@652.4,3517.6 ccw(c634.05,3535.95) 660,3535.95 ; R32.1@652.4,3517.6 ccw(c634.05,3535.95) 660,3535.95 ; R32.1@652.4,3517.6 ccw(c634.05,3535.95) 660,3535.95 ; R32.1@652.4,3517.6 ccw(c634.05,3535.95) 660,3535.95 ; R31.1@652.4,3577.4 cw(c634.05,3559.05) 660,3559.05 ; R31.1@652.4,3577.4 cw(c634.05,3559.05) 660,3559.05 ; R31.1@652.4,3577.4 cw(c634.05,3559.05) 660,3559.05 ; R31.1@652.4,3577.4 cw(c634.05,3559.05) 660,3559.05 ; R31.1@652.4,3577.4 cw(c634.05,3559.05) 660,3559.05 ; R31.1@652.4,3577.4 cw(c634.05,3559.05) 660,3559.05 ; R31.1@652.4,3577.4 cw(c634.05,3559.05) 660,3559.05 ; R31.1@652.4,3577.4 cw(c634.05,3559.05) 660,3559.05 ; 660,3535.95 ccw(c685.95,3535.95) R32.1@667.6,3517.6 ; 660,3535.95 ccw(c685.95,3535.95) R32.1@667.6,3517.6 ; 660,3535.95 ccw(c685.95,3535.95) R32.1@667.6,3517.6 ; 660,3535.95 ccw(c685.95,3535.95) R32.1@667.6,3517.6 ; 660,3535.95 ccw(c685.95,3535.95) R32.1@667.6,3517.6 ; 660,3535.95 ccw(c685.95,3535.95) R32.1@667.6,3517.6 ; 660,3535.95 ccw(c685.95,3535.95) R32.1@667.6,3517.6 ; 660,3535.95 ccw(c685.95,3535.95) R32.1@667.6,3517.6 ; 660,3559.05 cw(c685.95,3559.05) R31.1@667.6,3577.4 ; 660,3559.05 cw(c685.95,3559.05) R31.1@667.6,3577.4 ; 660,3559.05 cw(c685.95,3559.05) R31.1@667.6,3577.4 ; 660,3559.05 cw(c685.95,3559.05) R31.1@667.6,3577.4 ; 660,3559.05 cw(c685.95,3559.05) R31.1@667.6,3577.4 ; 660,3559.05 cw(c685.95,3559.05) R31.1@667.6,3577.4 ; 660,3559.05 cw(c685.95,3559.05) R31.1@667.6,3577.4 ; 660,3559.05 cw(c685.95,3559.05) R31.1@667.6,3577.4
NetQ2_1: Q2.1 R21.2 | length 917.3
  Top Layer w10: R21.2@2183.83,3265.18 2183.83,3328.83 v1(2185,3330) ; v1(2185,3665) 2185.6,3664.4 Q2.1@2375.69,3664.4 ; 2345.81,3664.4 cw(c2345.81,3638.45) Q2.1@2364.16,3656.8 ; 2345.81,3664.4 ccw(c2345.81,3690.35) Q2.1@2364.16,3672 ; 2345.81,3664.4 cw(c2345.81,3638.45) Q2.1@2364.16,3656.8 ; 2345.81,3664.4 ccw(c2345.81,3690.35) Q2.1@2364.16,3672 ; 2345.81,3664.4 cw(c2345.81,3638.45) Q2.1@2364.16,3656.8 ; 2345.81,3664.4 ccw(c2345.81,3690.35) Q2.1@2364.16,3672 ; 2345.81,3664.4 cw(c2345.81,3638.45) Q2.1@2364.16,3656.8 ; 2345.81,3664.4 ccw(c2345.81,3690.35) Q2.1@2364.16,3672 ; 2345.81,3664.4 cw(c2345.81,3638.45) Q2.1@2364.16,3656.8 ; 2345.81,3664.4 ccw(c2345.81,3690.35) Q2.1@2364.16,3672 ; 2345.81,3664.4 cw(c2345.81,3638.45) Q2.1@2364.16,3656.8 ; 2345.81,3664.4 ccw(c2345.81,3690.35) Q2.1@2364.16,3672 ; 2345.81,3664.4 cw(c2345.81,3638.45) Q2.1@2364.16,3656.8 ; 2345.81,3664.4 ccw(c2345.81,3690.35) Q2.1@2364.16,3672 ; 2345.81,3664.4 cw(c2345.81,3638.45) Q2.1@2364.16,3656.8 ; 2345.81,3664.4 ccw(c2345.81,3690.35) Q2.1@2364.16,3672
  Bottom Layer w10: v1(2185,3330) v1(2185,3665)
NetQ3_1: Q3.1 R211.1 | length 88.6
  Bottom Layer w10: R211.1@2160,2875 ccw(c2160,2876.69) 2161.69,2876.69 Q3.1@2161.69,2962.6
NetQ4_1: Q4.1 R222.1 | length 108.6
  Bottom Layer w10: R222.1@2605,3660 2710.91,3660 cw(c2710.91,3658.31) Q4.1@2712.6,3658.31
NetQ5_1: Q5.1 R233.1 | length 101.4
  Bottom Layer w10: R233.1@2275,3665 2365.91,3665 cw(c2365.91,3658.31) Q5.1@2372.6,3658.31
NetR24_1: R24.1 U5.8 | length 443
  Top Layer w10: R24.1@1613.83,3243.25 cw(c1616.55,3243.25) 1616.55,3245.98 U5.8@1776.8,3245.98 ; R24.1@1624.21,3234.84 cw(c1651.11,3207.94) 1651.11,3245.98 ; R24.1@1624.21,3234.84 cw(c1651.11,3207.94) 1651.11,3245.98 ; R24.1@1624.21,3234.84 cw(c1651.11,3207.94) 1651.11,3245.98 ; R24.1@1624.21,3234.84 cw(c1651.11,3207.94) 1651.11,3245.98 ; R24.1@1624.21,3234.84 cw(c1651.11,3207.94) 1651.11,3245.98 ; R24.1@1624.21,3255.6 ccw(c1647.45,3278.84) 1647.45,3245.98 ; R24.1@1624.21,3255.6 ccw(c1647.45,3278.84) 1647.45,3245.98 ; R24.1@1624.21,3255.6 ccw(c1647.45,3278.84) 1647.45,3245.98 ; R24.1@1624.21,3255.6 ccw(c1647.45,3278.84) 1647.45,3245.98 ; R24.1@1624.21,3255.6 ccw(c1647.45,3278.84) 1647.45,3245.98
NetR25_2: R25.2 U6.3 | length 597.6
  Top Layer w10: R25.2@1619,3537.19 ccw(c1621.59,3537.19) 1621.59,3534.6 U6.3@1804.71,3534.6 ; R25.2@1629.85,3529.59 cw(c1641.95,3517.49) 1641.95,3534.6 ; R25.2@1629.85,3529.59 cw(c1641.95,3517.49) 1641.95,3534.6 ; R25.2@1629.85,3529.59 cw(c1641.95,3517.49) 1641.95,3534.6 ; R25.2@1629.85,3529.59 cw(c1641.95,3517.49) 1641.95,3534.6 ; R25.2@1629.85,3529.59 cw(c1641.95,3517.49) 1641.95,3534.6 ; R25.2@1629.85,3544.79 ccw(c1654.44,3569.38) 1654.44,3534.6 ; R25.2@1629.85,3544.79 ccw(c1654.44,3569.38) 1654.44,3534.6 ; R25.2@1629.85,3544.79 ccw(c1654.44,3569.38) 1654.44,3534.6 ; R25.2@1629.85,3544.79 ccw(c1654.44,3569.38) 1654.44,3534.6 ; R25.2@1629.85,3544.79 ccw(c1654.44,3569.38) 1654.44,3534.6 ; 1775.47,3534.6 cw(c1775.47,3518.16) U6.3@1787.1,3529.78 ; 1775.47,3534.6 ccw(c1775.47,3551.04) U6.3@1787.1,3539.41 ; 1775.47,3534.6 cw(c1775.47,3518.16) U6.3@1787.1,3529.78 ; 1775.47,3534.6 ccw(c1775.47,3551.04) U6.3@1787.1,3539.41 ; 1775.47,3534.6 cw(c1775.47,3518.16) U6.3@1787.1,3529.78 ; 1775.47,3534.6 ccw(c1775.47,3551.04) U6.3@1787.1,3539.41 ; 1775.47,3534.6 cw(c1775.47,3518.16) U6.3@1787.1,3529.78 ; 1775.47,3534.6 ccw(c1775.47,3551.04) U6.3@1787.1,3539.41 ; 1775.47,3534.6 cw(c1775.47,3518.16) U6.3@1787.1,3529.78 ; 1775.47,3534.6 ccw(c1775.47,3551.04) U6.3@1787.1,3539.41 ; 1775.47,3534.6 cw(c1775.47,3518.16) U6.3@1787.1,3529.78 ; 1775.47,3534.6 ccw(c1775.47,3551.04) U6.3@1787.1,3539.41 ; 1775.47,3534.6 cw(c1775.47,3518.16) U6.3@1787.1,3529.78 ; 1775.47,3534.6 ccw(c1775.47,3551.04) U6.3@1787.1,3539.41 ; 1775.47,3534.6 cw(c1775.47,3518.16) U6.3@1787.1,3529.78 ; 1775.47,3534.6 ccw(c1775.47,3551.04) U6.3@1787.1,3539.41
NetR30_1: R30.1 U7.16 | length 653.6
  Top Layer w10: U7.16@775,3282.36 ccw(c780.55,3282.36) U7.16@780.55,3276.81 ; U7.16@780,3282.36 R30.1@780,3445 ; U7.16@770.17,3326.56 ccw(c746.43,3350.3) 780,3350.3 ; U7.16@770.17,3326.56 ccw(c746.43,3350.3) 780,3350.3 ; U7.16@770.17,3326.56 ccw(c746.43,3350.3) 780,3350.3 ; U7.16@770.17,3326.56 ccw(c746.43,3350.3) 780,3350.3 ; U7.16@770.17,3326.56 ccw(c746.43,3350.3) 780,3350.3 ; R30.1@770.65,3437.4 cw(c748.07,3414.82) 780,3414.82 ; R30.1@770.65,3437.4 cw(c748.07,3414.82) 780,3414.82 ; R30.1@770.65,3437.4 cw(c748.07,3414.82) 780,3414.82 ; R30.1@770.65,3437.4 cw(c748.07,3414.82) 780,3414.82 ; R30.1@770.65,3437.4 cw(c748.07,3414.82) 780,3414.82 ; 780,3352.96 ccw(c817.33,3352.96) U7.16@790.93,3326.56 ; 780,3352.96 ccw(c817.33,3352.96) U7.16@790.93,3326.56 ; 780,3352.96 ccw(c817.33,3352.96) U7.16@790.93,3326.56 ; 780,3352.96 ccw(c817.33,3352.96) U7.16@790.93,3326.56 ; 780,3352.96 ccw(c817.33,3352.96) U7.16@790.93,3326.56 ; 780,3423.28 cw(c799.97,3423.28) R30.1@785.85,3437.4 ; 780,3423.28 cw(c799.97,3423.28) R30.1@785.85,3437.4 ; 780,3423.28 cw(c799.97,3423.28) R30.1@785.85,3437.4 ; 780,3423.28 cw(c799.97,3423.28) R30.1@785.85,3437.4 ; 780,3423.28 cw(c799.97,3423.28) R30.1@785.85,3437.4
NetR49_2: R49.2 U12.94 | length 1194.5
  Top Layer w10: v2@2245.89,2045 U12.94@2245.89,2141.21 ; v2(2590,2445) R49.2@2657.01,2445 ; v2@2593.54,2441.46 cw(c2602.07,2432.93) 2602.07,2445 cw(c2602.07,2457.07) v2@2593.54,2448.54 ; R49.2@2649.41,2437.4 ccw(c2631.06,2419.05) 2631.06,2445 ccw(c2631.06,2470.95) R49.2@2649.41,2452.6 ; v2@2241.46,2048.54 ccw(c2230.78,2059.22) 2245.89,2059.22 ; v2@2241.46,2048.54 ccw(c2230.78,2059.22) 2245.89,2059.22 ; v2@2241.46,2048.54 ccw(c2230.78,2059.22) 2245.89,2059.22 ; v2@2241.46,2048.54 ccw(c2230.78,2059.22) 2245.89,2059.22 ; v2@2241.46,2048.54 ccw(c2230.78,2059.22) 2245.89,2059.22 ; v2@2241.46,2048.54 ccw(c2230.78,2059.22) 2245.89,2059.22 ; v2@2241.46,2048.54 ccw(c2230.78,2059.22) 2245.89,2059.22 ; v2@2241.46,2048.54 ccw(c2230.78,2059.22) 2245.89,2059.22
  Bottom Layer w10: v2(2245,2045) 2499.19,2045 ccw(c2499.19,2090.81) 2545,2090.81 2545,2400 cw(c2590,2400) v2(2590,2445) ; v2@2585.67,2447.5 cw(c2575.22,2453.54) 2578.34,2441.88 cw(c2581.46,2430.22) v2@2587.5,2440.67 ; v2@2248.54,2041.46 cw(c2257.07,2032.93) 2257.07,2045 ; v2@2248.54,2041.46 cw(c2257.07,2032.93) 2257.07,2045 ; v2@2248.54,2041.46 cw(c2257.07,2032.93) 2257.07,2045 ; v2@2248.54,2041.46 cw(c2257.07,2032.93) 2257.07,2045 ; v2@2248.54,2041.46 cw(c2257.07,2032.93) 2257.07,2045 ; v2@2248.54,2041.46 cw(c2257.07,2032.93) 2257.07,2045 ; v2@2248.54,2041.46 cw(c2257.07,2032.93) 2257.07,2045 ; v2@2248.54,2041.46 cw(c2257.07,2032.93) 2257.07,2045 ; v2@2248.54,2048.54 ccw(c2257.07,2057.07) 2257.07,2045 ; v2@2248.54,2048.54 ccw(c2257.07,2057.07) 2257.07,2045 ; v2@2248.54,2048.54 ccw(c2257.07,2057.07) 2257.07,2045 ; v2@2248.54,2048.54 ccw(c2257.07,2057.07) 2257.07,2045 ; v2@2248.54,2048.54 ccw(c2257.07,2057.07) 2257.07,2045 ; v2@2248.54,2048.54 ccw(c2257.07,2057.07) 2257.07,2045 ; v2@2248.54,2048.54 ccw(c2257.07,2057.07) 2257.07,2045 ; v2@2248.54,2048.54 ccw(c2257.07,2057.07) 2257.07,2045
NetR59_1: R59.1 U13.1 | length 810.6
  Top Layer w10: U13.1@779,2174.13 779,2304 cw(c780,2304) R59.1@780,2305 ; U13.1@765.83,2210.92 ccw(c734.04,2242.71) 779,2242.71 ; U13.1@765.83,2210.92 ccw(c734.04,2242.71) 779,2242.71 ; U13.1@765.83,2210.92 ccw(c734.04,2242.71) 779,2242.71 ; U13.1@765.83,2210.92 ccw(c734.04,2242.71) 779,2242.71 ; U13.1@765.83,2210.92 ccw(c734.04,2242.71) 779,2242.71 ; R59.1@772.4,2297.4 cw(c756.47,2281.47) 779,2281.47 ; R59.1@772.4,2297.4 cw(c756.47,2281.47) 779,2281.47 ; R59.1@772.4,2297.4 cw(c756.47,2281.47) 779,2281.47 ; R59.1@772.4,2297.4 cw(c756.47,2281.47) 779,2281.47 ; R59.1@772.4,2297.4 cw(c756.47,2281.47) 779,2281.47 ; R59.1@772.4,2297.4 cw(c756.47,2281.47) 779,2281.47 ; R59.1@772.4,2297.4 cw(c756.47,2281.47) 779,2281.47 ; R59.1@772.4,2297.4 cw(c756.47,2281.47) 779,2281.47 ; 779,2242.71 ccw(c823.96,2242.71) U13.1@792.17,2210.92 ; 779,2242.71 ccw(c823.96,2242.71) U13.1@792.17,2210.92 ; 779,2242.71 ccw(c823.96,2242.71) U13.1@792.17,2210.92 ; 779,2242.71 ccw(c823.96,2242.71) U13.1@792.17,2210.92 ; 779,2242.71 ccw(c823.96,2242.71) U13.1@792.17,2210.92 ; 779,2276.64 cw(c808.36,2276.64) R59.1@787.6,2297.4 ; 779,2276.64 cw(c808.36,2276.64) R59.1@787.6,2297.4 ; 779,2276.64 cw(c808.36,2276.64) R59.1@787.6,2297.4 ; 779,2276.64 cw(c808.36,2276.64) R59.1@787.6,2297.4 ; 779,2276.64 cw(c808.36,2276.64) R59.1@787.6,2297.4 ; 779,2276.64 cw(c808.36,2276.64) R59.1@787.6,2297.4 ; 779,2276.64 cw(c808.36,2276.64) R59.1@787.6,2297.4 ; 779,2276.64 cw(c808.36,2276.64) R59.1@787.6,2297.4
NetR62_1: R62.1 U13.11 | length 887.3
  Top Layer w10: U13.11@385.3,1552.08 385.3,1505.7 ccw(c419,1505.7) 419,1472 484,1472 cw(c484,1422) 534,1422 R62.1@534,1367 ; U13.11@376.58,1512 cw(c366.62,1493.2) 387.17,1498.71 ; U13.11@376.58,1512 cw(c366.62,1493.2) 387.17,1498.71 ; U13.11@376.58,1512 cw(c366.62,1493.2) 387.17,1498.71 ; U13.11@376.58,1512 cw(c366.62,1493.2) 387.17,1498.71 ; U13.11@376.58,1512 cw(c366.62,1493.2) 387.17,1498.71 ; U13.11@376.58,1512 cw(c366.62,1493.2) 387.17,1498.71 ; U13.11@376.58,1512 cw(c366.62,1493.2) 387.17,1498.71 ; U13.11@376.58,1512 cw(c366.62,1493.2) 387.17,1498.71 ; 387.17,1498.7 cw(c397.85,1501.57) U13.11@393.17,1511.58 ; 387.17,1498.7 cw(c397.85,1501.57) U13.11@393.17,1511.58 ; 387.17,1498.7 cw(c397.85,1501.57) U13.11@393.17,1511.58 ; 387.17,1498.7 cw(c397.85,1501.57) U13.11@393.17,1511.58 ; 387.17,1498.7 cw(c397.85,1501.57) U13.11@393.17,1511.58 ; 387.17,1498.7 cw(c397.85,1501.57) U13.11@393.17,1511.58 ; 387.17,1498.7 cw(c397.85,1501.57) U13.11@393.17,1511.58 ; 387.17,1498.7 cw(c397.85,1501.57) U13.11@393.17,1511.58 ; R62.1@526.4,1377.85 ccw(c508.05,1396.2) 534,1396.2 ; R62.1@526.4,1377.85 ccw(c508.05,1396.2) 534,1396.2 ; R62.1@526.4,1377.85 ccw(c508.05,1396.2) 534,1396.2 ; R62.1@526.4,1377.85 ccw(c508.05,1396.2) 534,1396.2 ; R62.1@526.4,1377.85 ccw(c508.05,1396.2) 534,1396.2 ; R62.1@526.4,1377.85 ccw(c508.05,1396.2) 534,1396.2 ; R62.1@526.4,1377.85 ccw(c508.05,1396.2) 534,1396.2 ; R62.1@526.4,1377.85 ccw(c508.05,1396.2) 534,1396.2 ; 534,1396.2 ccw(c559.95,1396.2) R62.1@541.6,1377.85 ; 534,1396.2 ccw(c559.95,1396.2) R62.1@541.6,1377.85 ; 534,1396.2 ccw(c559.95,1396.2) R62.1@541.6,1377.85 ; 534,1396.2 ccw(c559.95,1396.2) R62.1@541.6,1377.85 ; 534,1396.2 ccw(c559.95,1396.2) R62.1@541.6,1377.85 ; 534,1396.2 ccw(c559.95,1396.2) R62.1@541.6,1377.85 ; 534,1396.2 ccw(c559.95,1396.2) R62.1@541.6,1377.85 ; 534,1396.2 ccw(c559.95,1396.2) R62.1@541.6,1377.85
NETTLIGHT: R21.1 U3.16 | length 674.2
  Top Layer w10: R21.1@2183.83,3198.25 ccw(c2188.46,3198.25) 2188.46,3193.61 U3.16@2410.42,3193.61 ; R21.1@2194.21,3185.9 cw(c2212.84,3167.27) 2212.84,3193.61 ; R21.1@2194.21,3185.9 cw(c2212.84,3167.27) 2212.84,3193.61 ; R21.1@2194.21,3185.9 cw(c2212.84,3167.27) 2212.84,3193.61 ; R21.1@2194.21,3185.9 cw(c2212.84,3167.27) 2212.84,3193.61 ; R21.1@2194.21,3185.9 cw(c2212.84,3167.27) 2212.84,3193.61 ; R21.1@2194.21,3206.67 ccw(c2225.72,3238.18) 2225.72,3193.61 ; R21.1@2194.21,3206.67 ccw(c2225.72,3238.18) 2225.72,3193.61 ; R21.1@2194.21,3206.67 ccw(c2225.72,3238.18) 2225.72,3193.61 ; R21.1@2194.21,3206.67 ccw(c2225.72,3238.18) 2225.72,3193.61 ; R21.1@2194.21,3206.67 ccw(c2225.72,3238.18) 2225.72,3193.61 ; 2353.79,3193.61 cw(c2353.79,3172.42) U3.16@2368.78,3187.41 ; 2353.79,3193.61 ccw(c2353.79,3214.81) U3.16@2368.78,3199.82 ; 2353.79,3193.61 cw(c2353.79,3172.42) U3.16@2368.78,3187.41 ; 2353.79,3193.61 ccw(c2353.79,3214.81) U3.16@2368.78,3199.82 ; 2353.79,3193.61 cw(c2353.79,3172.42) U3.16@2368.78,3187.41 ; 2353.79,3193.61 ccw(c2353.79,3214.81) U3.16@2368.78,3199.82 ; 2353.79,3193.61 cw(c2353.79,3172.42) U3.16@2368.78,3187.41 ; 2353.79,3193.61 ccw(c2353.79,3214.81) U3.16@2368.78,3199.82 ; 2353.79,3193.61 cw(c2353.79,3172.42) U3.16@2368.78,3187.41 ; 2353.79,3193.61 ccw(c2353.79,3214.81) U3.16@2368.78,3199.82
NRF_CE: J9.3 U12.95 | length 2142.8
  Top Layer w10: U12.95@2226.2,2141.21 2226.2,2279.2 cw(c2234,2279.2) v2@2234,2287 ; 2228.92,2263.54 ccw(c2213.86,2272.23) v2@2229.5,2279.82 ; 2226.2,2251.11 cw(c2264.89,2251.11) 2237.54,2278.46 ccw(c2264.89,2251.11) 2226.2,2251.11 ; 2226.2,2275.25 cw(c2240.75,2275.25) 2230.46,2285.54 ccw(c2240.75,2275.25) 2226.2,2275.25
  Bottom Layer w10: J9.3@1319,2387 1319,2327.81 ; v2(2234,2282) 1364.81,2282 cw(c1364.81,2327.81) 1319,2327.81 ; J9.3@1301.66,2369.65 cw(c1259.86,2327.81) 1319,2327.81 ; J9.3@1301.66,2369.65 cw(c1259.86,2327.81) 1319,2327.81 ; J9.3@1301.66,2369.65 cw(c1259.86,2327.81) 1319,2327.81 ; J9.3@1301.66,2369.65 cw(c1259.86,2327.81) 1319,2327.81 ; J9.3@1301.66,2369.65 cw(c1259.86,2327.81) 1319,2327.81 ; J9.3@1308.73,2376.72 cw(c1283.97,2351.94) 1319,2351.94 ; J9.3@1308.73,2376.72 cw(c1283.97,2351.94) 1319,2351.94 ; J9.3@1308.73,2376.72 cw(c1283.97,2351.94) 1319,2351.94 ; J9.3@1308.73,2376.72 cw(c1283.97,2351.94) 1319,2351.94 ; J9.3@1308.73,2376.72 cw(c1283.97,2351.94) 1319,2351.94 ; 1319,2327.81 cw(c1378.14,2327.81) J9.3@1336.34,2369.65 ; 1319,2327.81 cw(c1378.14,2327.81) J9.3@1336.34,2369.65 ; 1319,2327.81 cw(c1378.14,2327.81) J9.3@1336.34,2369.65 ; 1319,2327.81 cw(c1378.14,2327.81) J9.3@1336.34,2369.65 ; 1319,2327.81 cw(c1378.14,2327.81) J9.3@1336.34,2369.65 ; 1319,2351.94 cw(c1354.03,2351.94) J9.3@1329.27,2376.72 ; 1319,2351.94 cw(c1354.03,2351.94) J9.3@1329.27,2376.72 ; 1319,2351.94 cw(c1354.03,2351.94) J9.3@1329.27,2376.72 ; 1319,2351.94 cw(c1354.03,2351.94) J9.3@1329.27,2376.72 ; 1319,2351.94 cw(c1354.03,2351.94) J9.3@1329.27,2376.72 ; 2221.93,2282 cw(c2221.93,2269.93) v2@2230.46,2278.46 ; 2221.93,2282 ccw(c2221.93,2294.07) v2@2230.46,2285.54 ; 2221.93,2282 cw(c2221.93,2269.93) v2@2230.46,2278.46 ; 2221.93,2282 ccw(c2221.93,2294.07) v2@2230.46,2285.54 ; 2221.93,2282 cw(c2221.93,2269.93) v2@2230.46,2278.46 ; 2221.93,2282 ccw(c2221.93,2294.07) v2@2230.46,2285.54 ; 2221.93,2282 cw(c2221.93,2269.93) v2@2230.46,2278.46 ; 2221.93,2282 ccw(c2221.93,2294.07) v2@2230.46,2285.54 ; 2221.93,2282 cw(c2221.93,2269.93) v2@2230.46,2278.46 ; 2221.93,2282 ccw(c2221.93,2294.07) v2@2230.46,2285.54 ; 2221.93,2282 cw(c2221.93,2269.93) v2@2230.46,2278.46 ; 2221.93,2282 ccw(c2221.93,2294.07) v2@2230.46,2285.54 ; 2221.93,2282 cw(c2221.93,2269.93) v2@2230.46,2278.46 ; 2221.93,2282 ccw(c2221.93,2294.07) v2@2230.46,2285.54 ; 2221.93,2282 cw(c2221.93,2269.93) v2@2230.46,2278.46 ; 2221.93,2282 ccw(c2221.93,2294.07) v2@2230.46,2285.54
NRF_IRQ: J9.8 U12.96 | length 1014.7
  Top Layer w10: J9.8@1519,2487 2163.14,2487 cw(c2163.14,2443.62) 2206.52,2443.62 U12.96@2206.52,2141.21